# Altium PCB ESC.PcbDoc (part 1 of 2)
Units mm, origin at the board's own origin, x right, y up, seen from the top; angles counter-clockwise.
Board outline 45.01 x 30 mm, 4 copper layers (L1-SIGNAL/PWR, L2-GND, L3-PWR, L4-SIGNAL/PWR), stack 1.723 mm thick; 140 components, 74 nets, 427 pads, 338 vias.
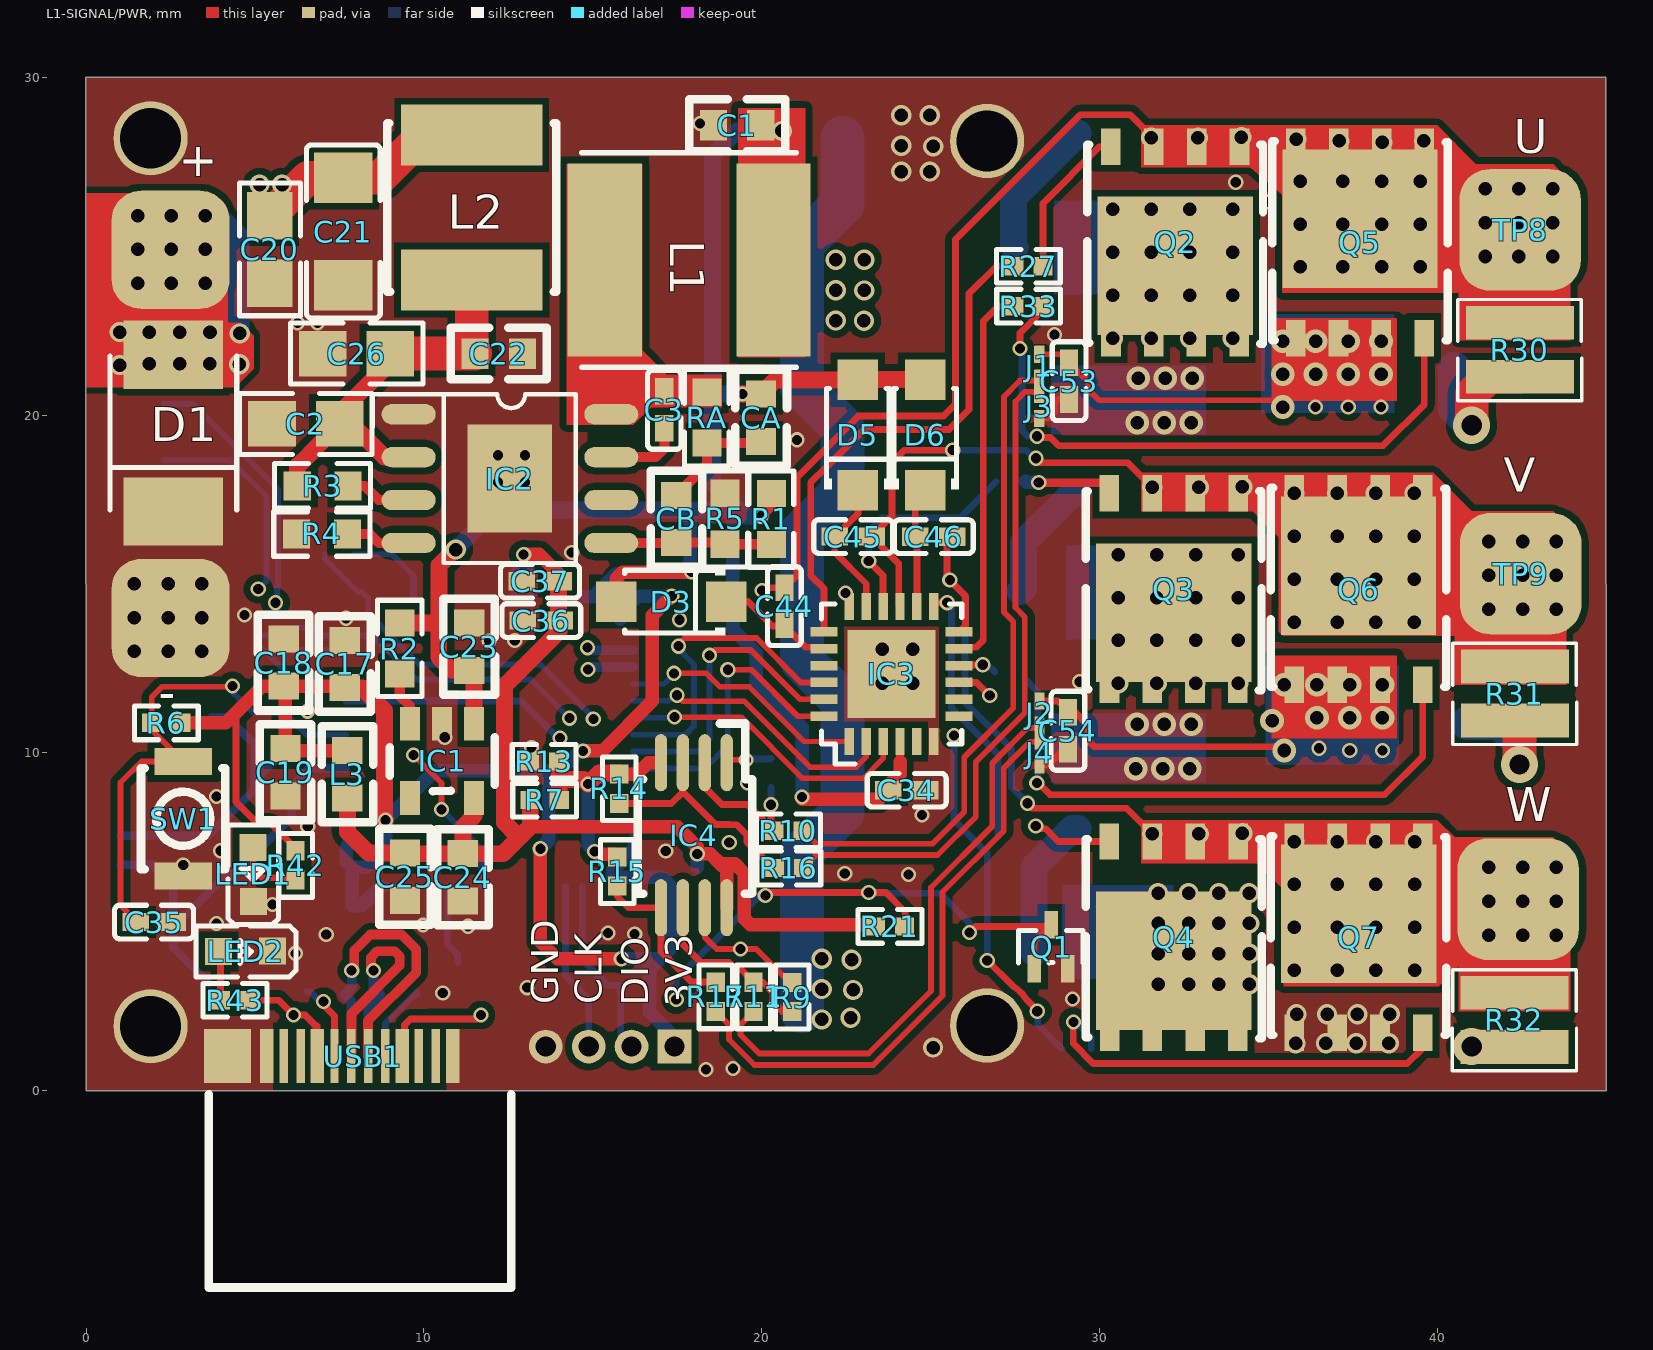
[diagram p0: L1-SIGNAL/PWR view]
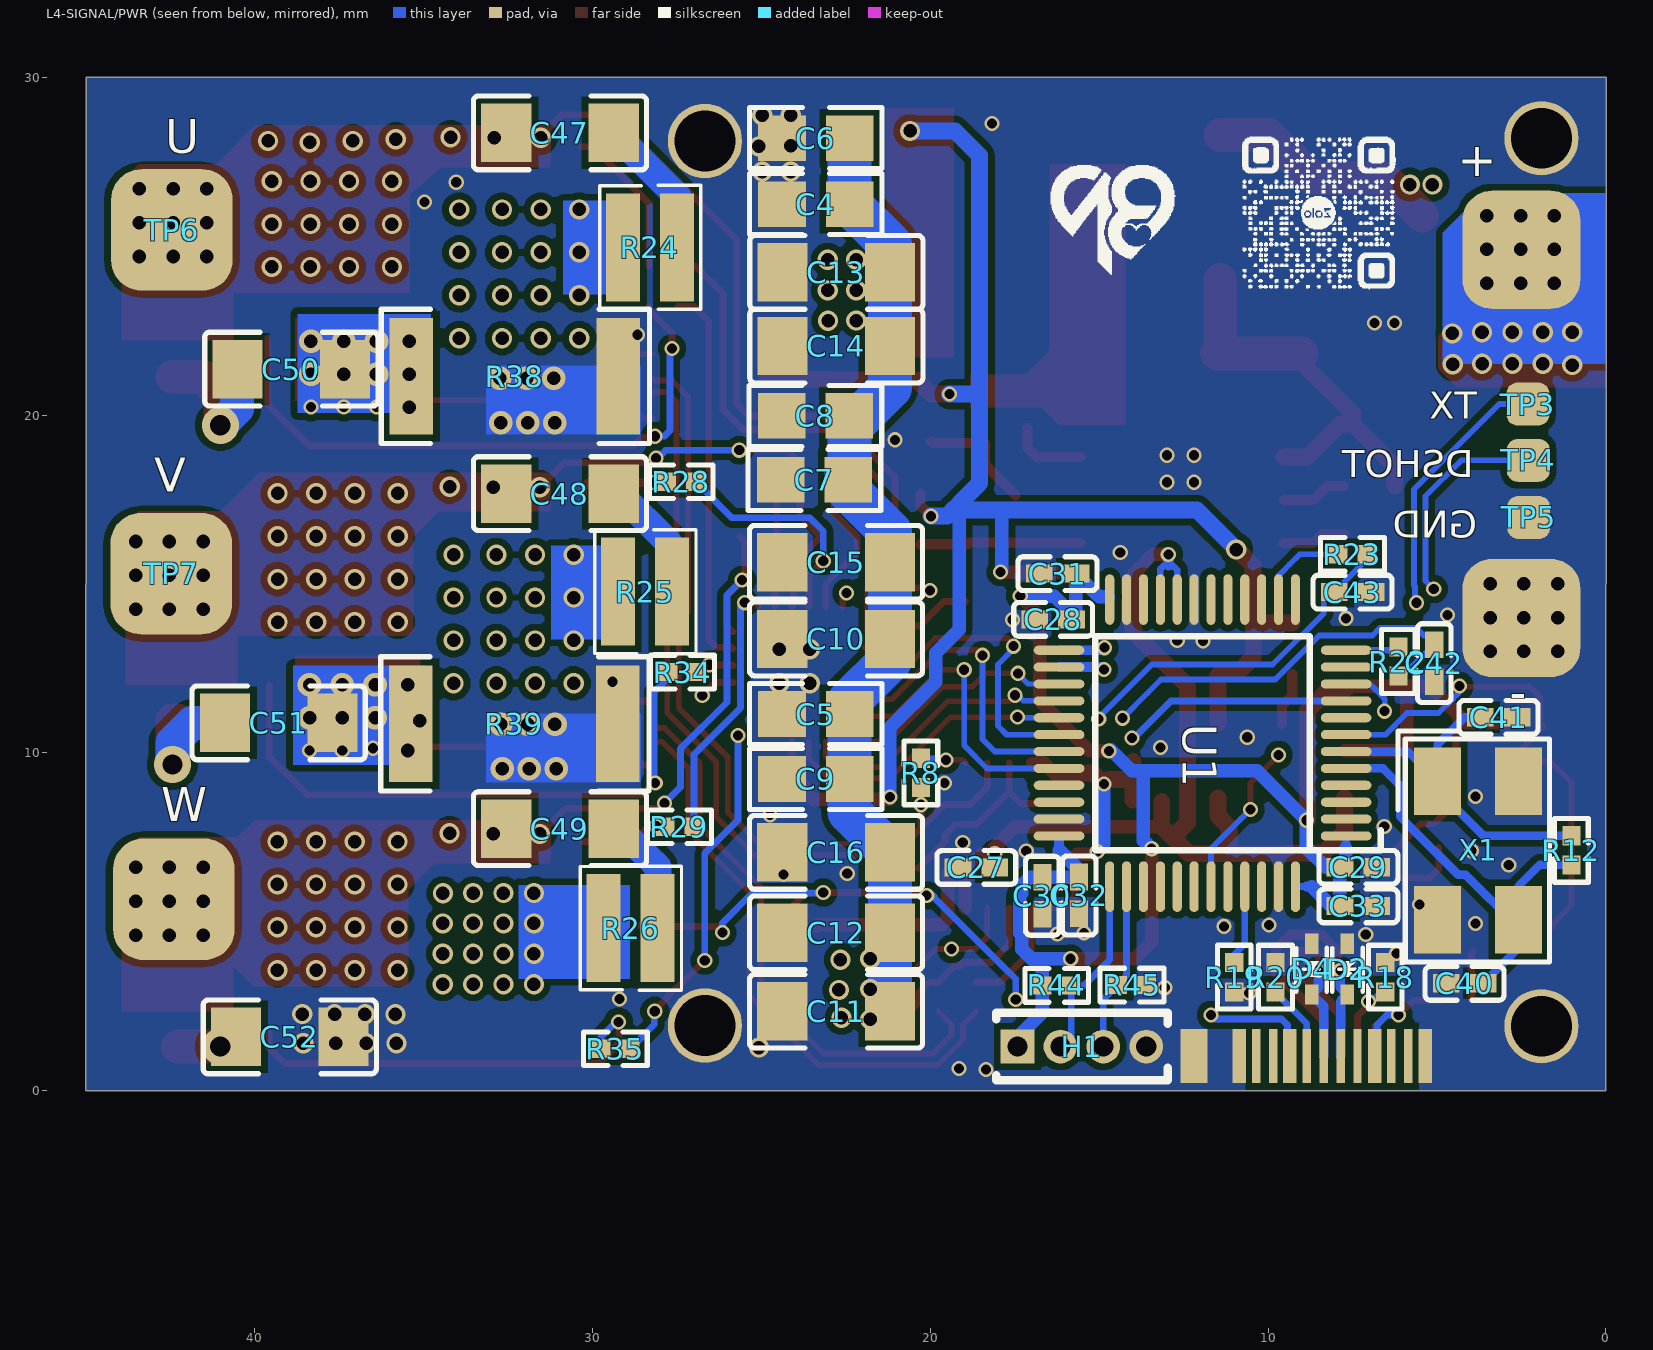
[diagram p1: L4-SIGNAL/PWR view, seen from below]
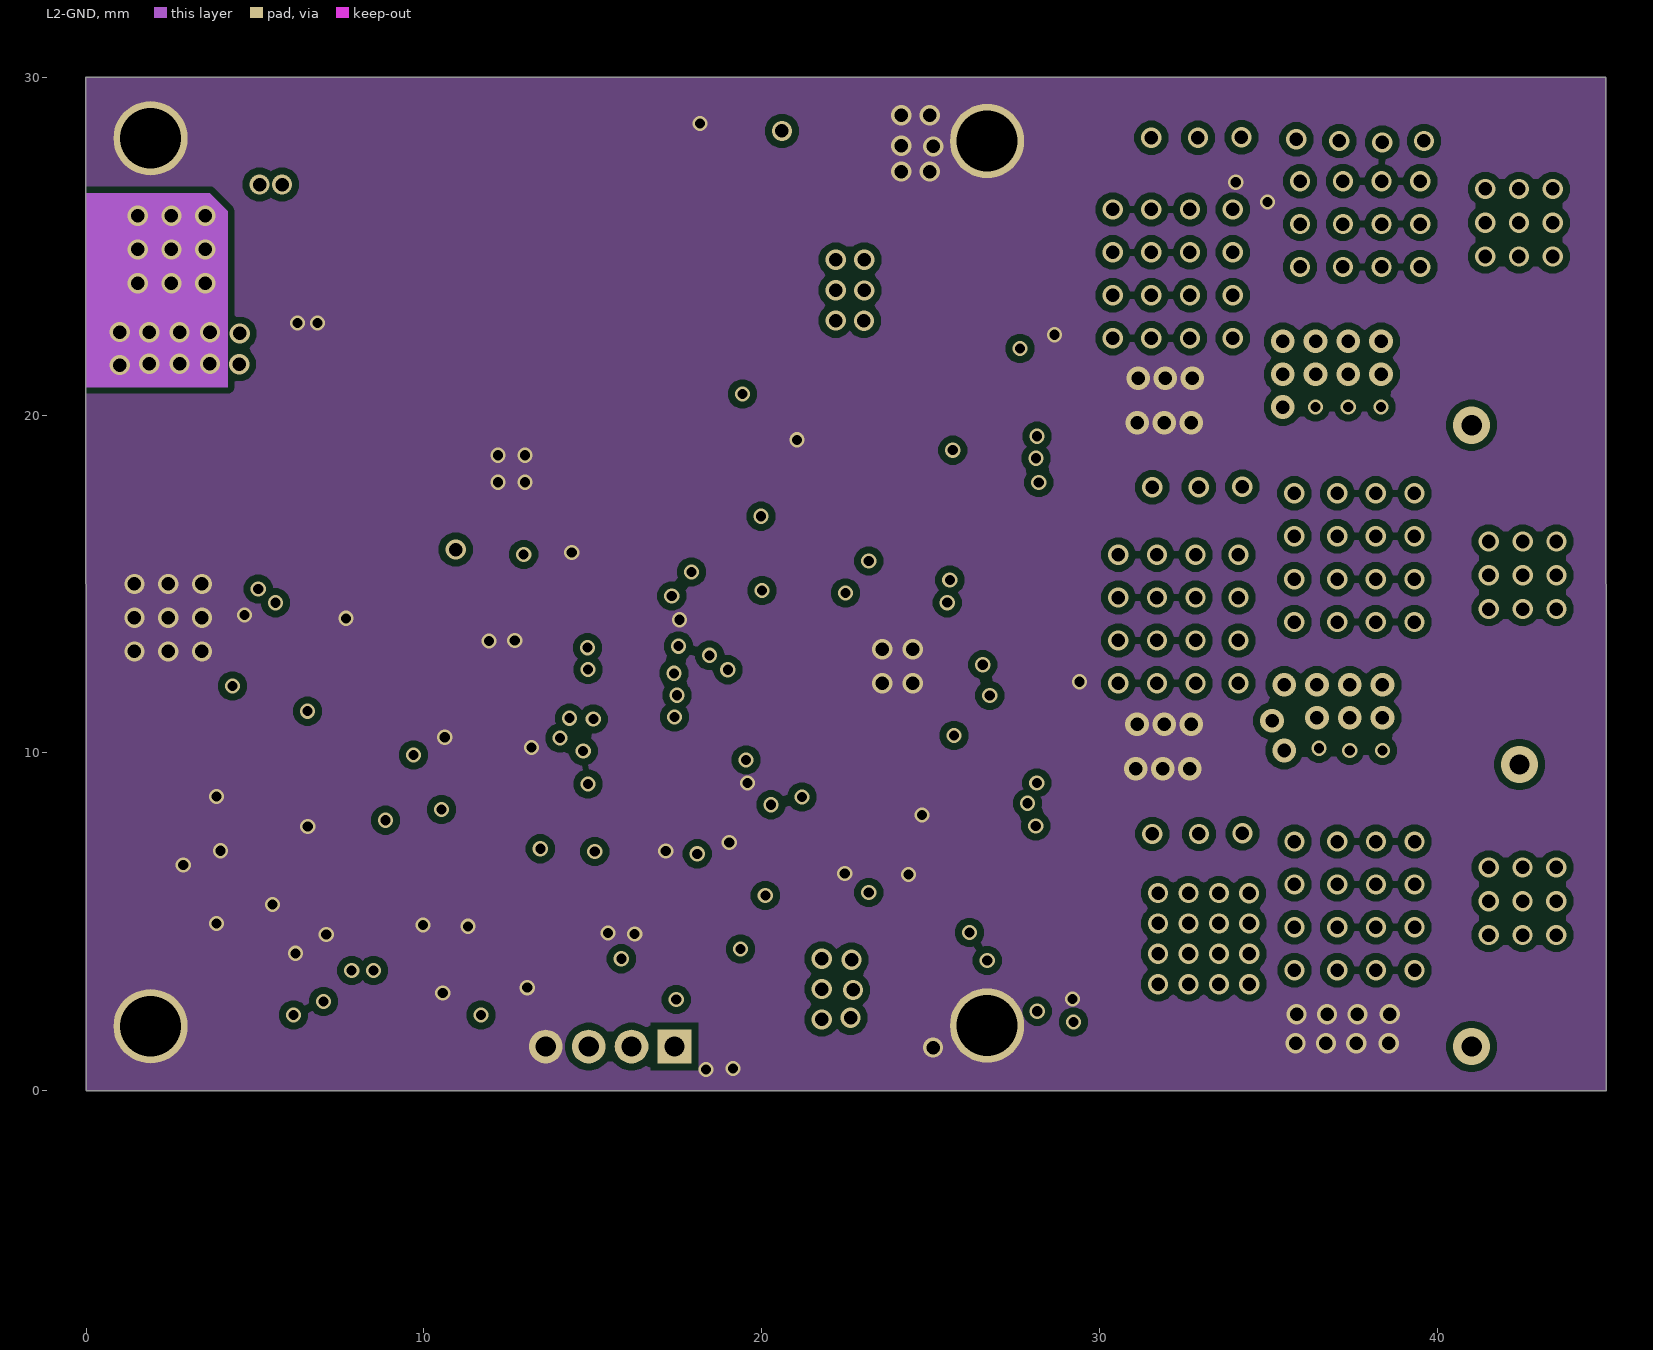
[diagram p2: L2-GND]
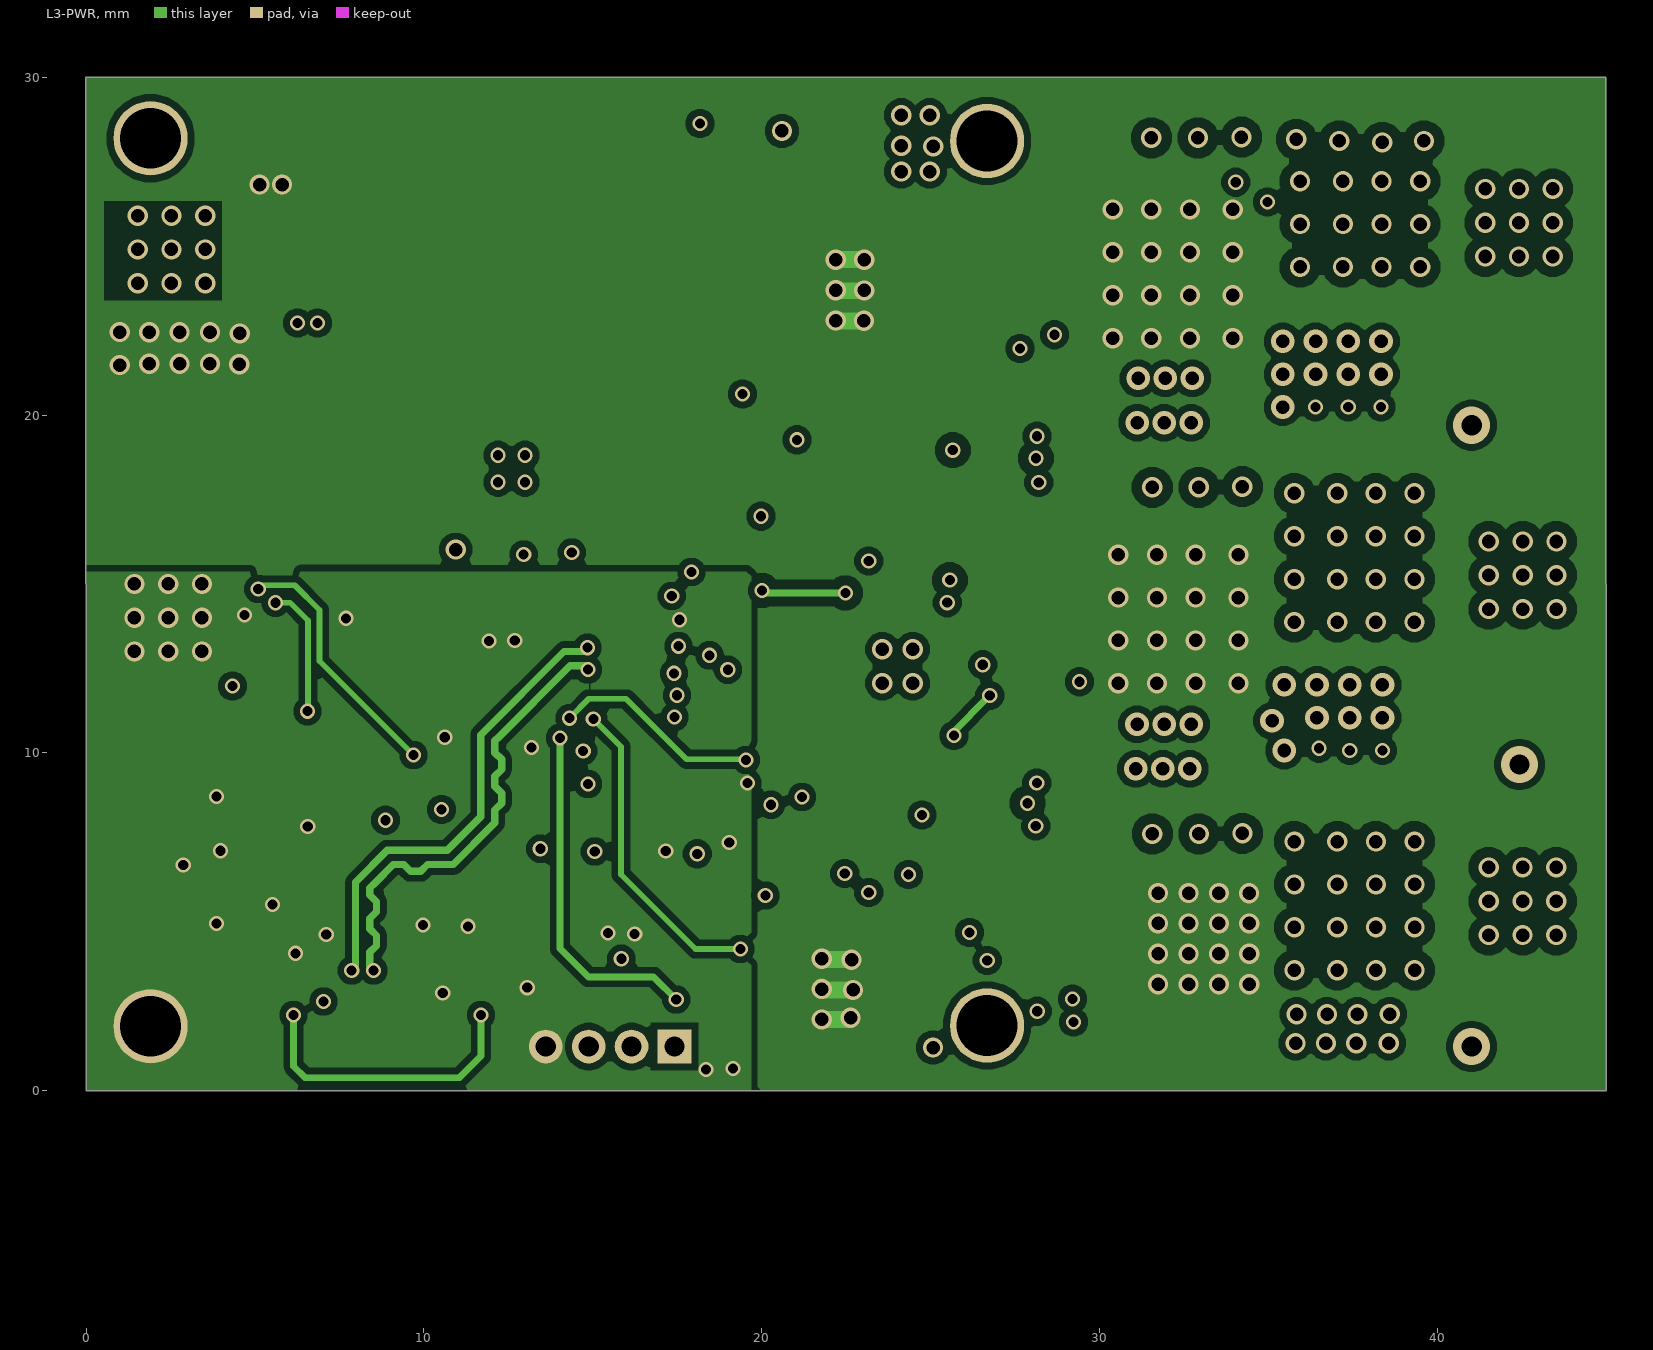
[diagram p3: L3-PWR]
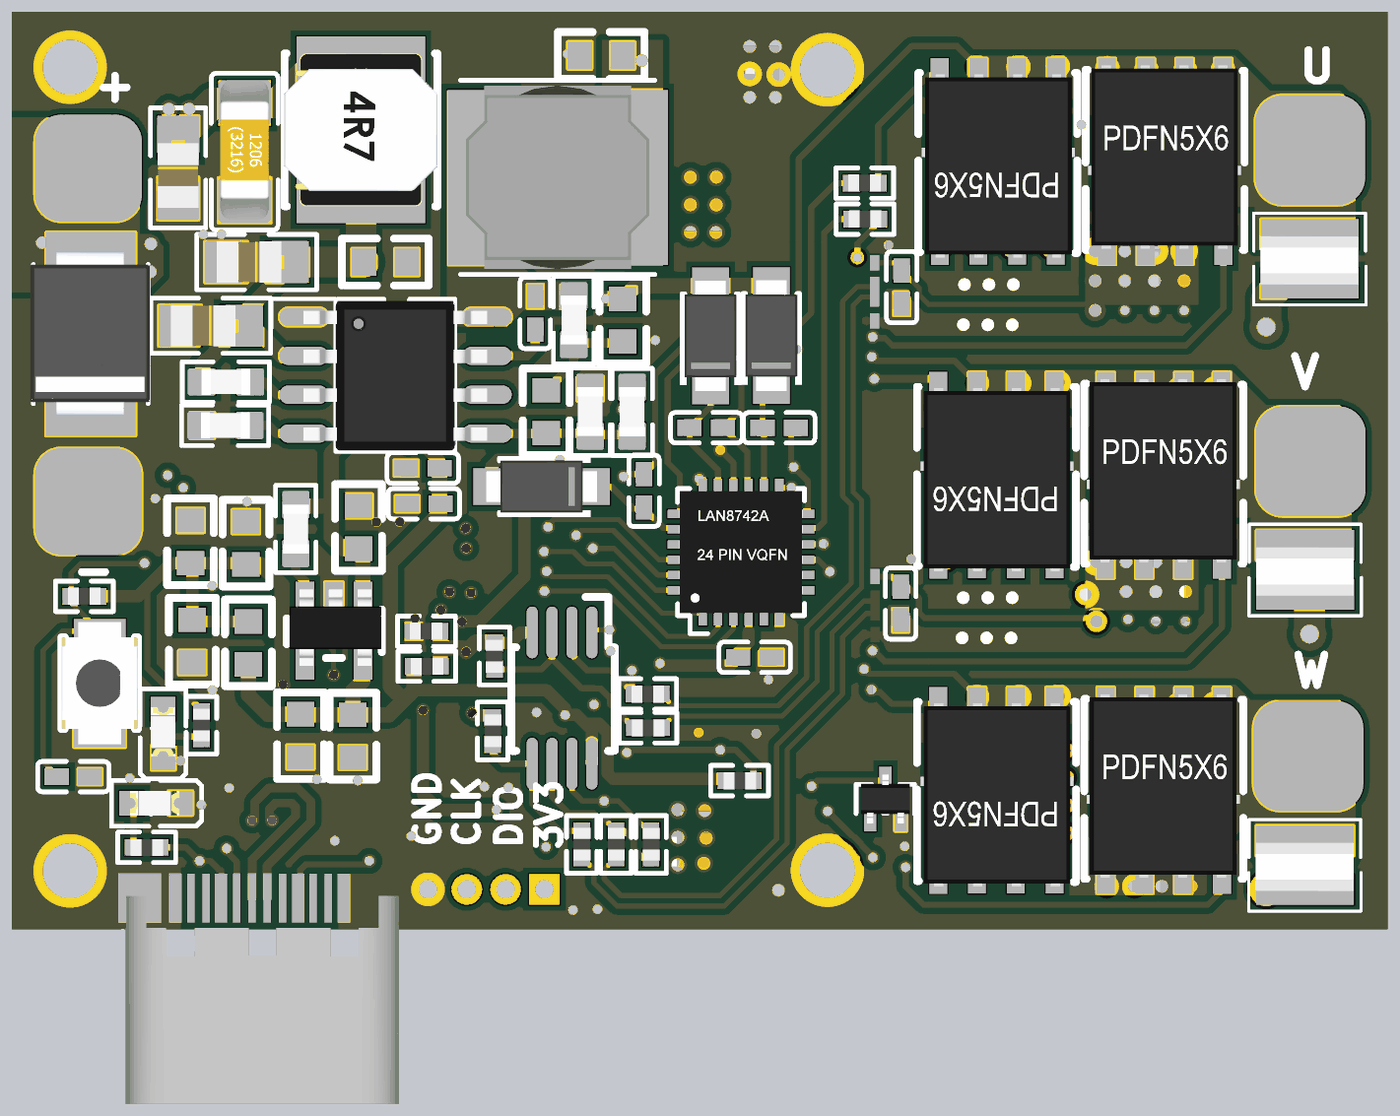
[diagram p5: 3D render of the assembled board from above, using the file's embedded part models]
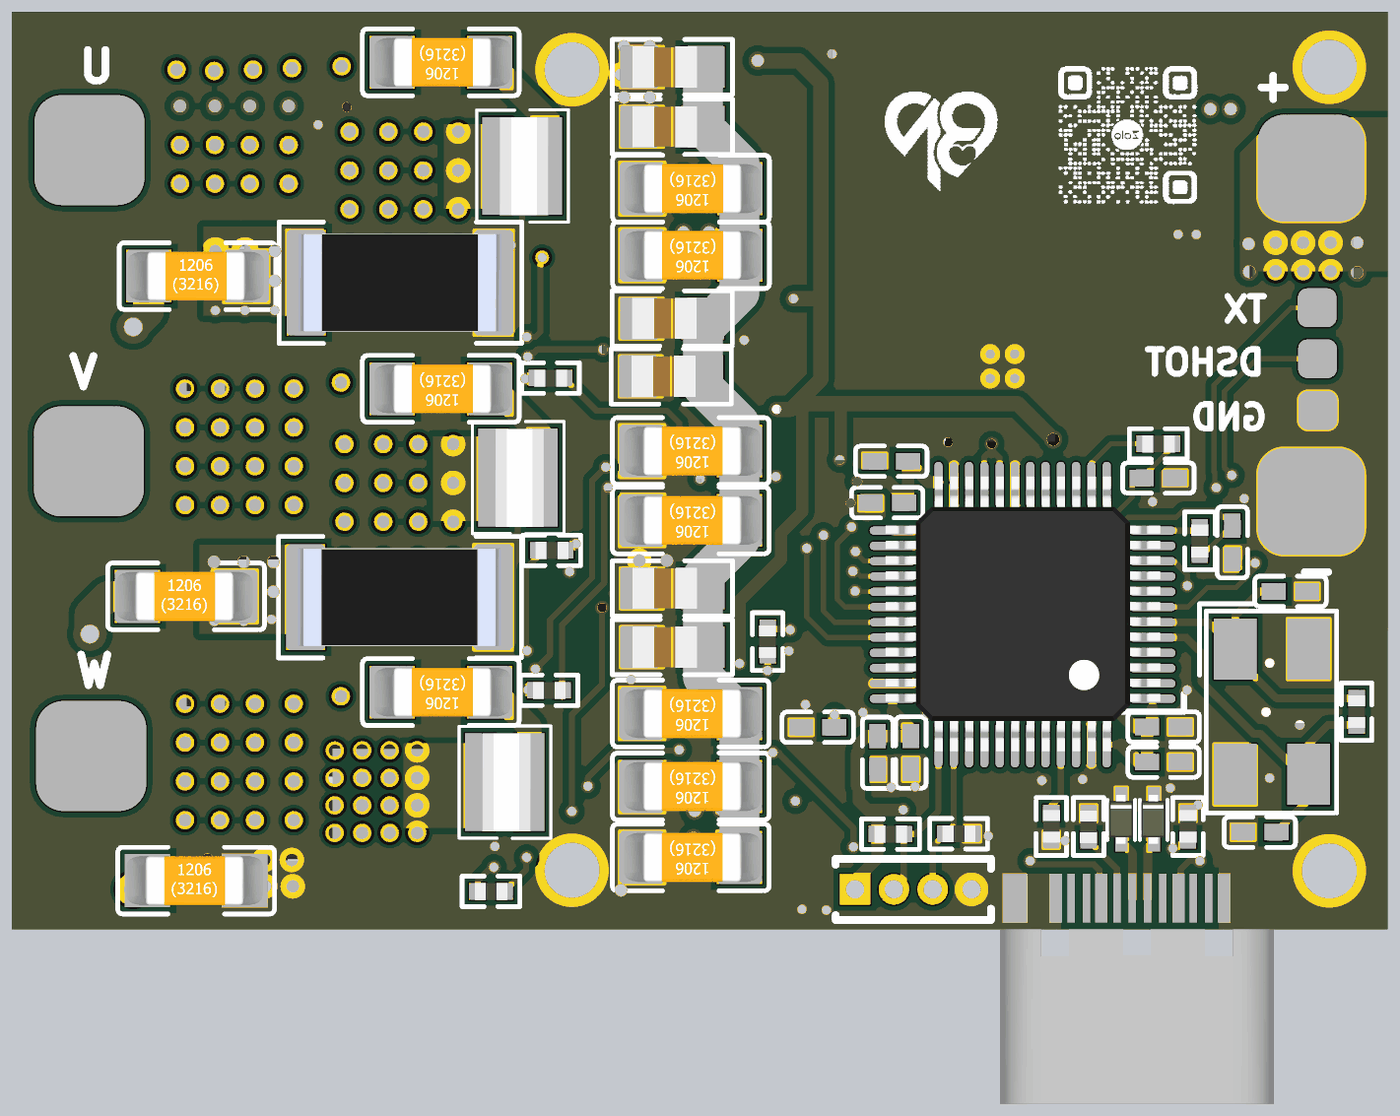
[diagram p6: 3D render of the assembled board from below, using the file's embedded part models]

## Layer stack, top to bottom
Top Solder: solder mask 0.0102, Solder Resist, Dk 3.5
L1-SIGNAL/PWR: signal copper 0.0356
Dielectric 2: prepreg 0.107, 3313, Dk 4.5
Dielectric 4: prepreg 0.0935, PP-006, Dk 4.1
L2-GND: signal copper 0.07
Dielectric 3: core 0.92, Core-042, Dk 4.6
L3-PWR: signal copper 0.07
Dielectric 1: dielectric 0.32, FR-4, Dk 4.8
Dielectric 5: prepreg 0.0711, PP-006, Dk 4.1
L4-SIGNAL/PWR: signal copper 0.0356
Bottom Solder: solder mask 0.0102, Solder Resist, Dk 3.5

## Board outline
0,0 -0.009,30 44.991,30 45,0

## Design rules (kind name [scope] priority, off if disabled: settings)
Clearance Clearance_1 [InNet('VM') vs InNet('SHA') OR InNet('SHB') OR InNet('SHC')] p1: gap=0.2 ignorepadtopadclearanceinfootprint=TRUE except(0.3: Arc-Fill Arc-Poly Arc-Region Track-Fill Track-Poly Track-Region SMDPad-Fill SMDPad-Poly SMDPad-Region THPad-Fill THPad-Poly THPad-Region Via-Fill Via-Poly Via-Region Fill-Fill Fill-Poly Fill-Region Poly-Poly Poly-Region Region-Region)
Clearance [All] p2: gap=0.2 ignorepadtopadclearanceinfootprint=TRUE except(0.17: Arc-Arc Arc-Track Track-Track)
DiffPairsRouting DiffPair_DIFF90DiffPairsRouting [InDifferentialPair ('USB')] p1: maxlimit=0.254 minlimit=0.203 mostfreqgap=0.254 toplayer_mingap=0.203 toplayer_prefgap=0.203 toplayer_minwidth=0.289 toplayer_maxwidth=0.381 toplayer_prefwidth=0.289 midlayer1_mingap=0.254 midlayer1_minwidth=0.381 midlayer1_maxwidth=0.381 midlayer1_prefwidth=0.381 midlayer2_mingap=0.203 midlayer2_prefgap=0.203 midlayer2_minwidth=0.217 midlayer2_maxwidth=0.381 midlayer2_prefwidth=0.217 bottomlayer_prefgap=0.203 bottomlayer_minwidth=0.289 bottomlayer_maxwidth=0.381 bottomlayer_prefwidth=0.289 maxuncoupledlength=12.7
DiffPairsRouting DiffPair_DIFFDiffPairsRouting [InDifferentialPairClass('DIFF')] p2: maxlimit=0.17 minlimit=0.17 mostfreqgap=0.17 toplayer_minwidth=0.17 toplayer_maxwidth=0.17 toplayer_prefwidth=0.17 midlayer1_minwidth=0.17 midlayer1_maxwidth=0.17 midlayer1_prefwidth=0.17 midlayer2_minwidth=0.17 midlayer2_maxwidth=0.17 midlayer2_prefwidth=0.17 bottomlayer_minwidth=0.17 bottomlayer_maxwidth=0.17 bottomlayer_prefwidth=0.17 maxuncoupledlength=12.7
DiffPairsRouting [All] p3: maxlimit=0.254 minlimit=0.254 mostfreqgap=0.254 toplayer_minwidth=0.381 toplayer_maxwidth=0.381 toplayer_prefwidth=0.381 midlayer1_minwidth=0.381 midlayer1_maxwidth=0.381 midlayer1_prefwidth=0.381 midlayer2_minwidth=0.381 midlayer2_maxwidth=0.381 midlayer2_prefwidth=0.381 bottomlayer_minwidth=0.381 bottomlayer_maxwidth=0.381 bottomlayer_prefwidth=0.381 maxuncoupledlength=12.7
HoleToHoleClearance [All] p1: gap=0.2 allowstackedmicrovias=TRUE
MatchedLengths DiffPair_DIFF90MatchedLengths [InDifferentialPair ('USB')] p1: tolerance=1.5 checknetsindiffpair=TRUE checkdiffpairvsdiffpair=FALSE checkxsignals=FALSE checkothers=FALSE
MatchedLengths DiffPair_DIFFMatchedLengths [InDifferentialPairClass('DIFF')] p2: tolerance=25.4 checknetsindiffpair=TRUE checkdiffpairvsdiffpair=FALSE checkxsignals=FALSE checkothers=FALSE
MinimumSolderMaskSliver [All] p1: minsoldermaskwidth=0.1
PlaneConnect [All] p1: planeconnectstyle=Direct reliefexpansion=0.508 reliefentries=4 reliefconductorwidth=0.254 reliefairgap=0.254
PolygonConnect [All] p1: connectstyle=Direct reliefconductorwidth=0.254 reliefentries=4 polygonreliefangle="90 Angle" airgapwidth=0.254
RoutingVias [All] p1: holewidth=0.4 width=0.7 viastyle="Through Hole" minholewidth=0.2 minwidth=0.4 maxholewidth=0.6 maxwidth=1.1
SilkToSilkClearance [All] p1: silktosilkclearance=0
SilkToSolderMaskClearance [IsPad] p1: minsilkscreentomaskgap=0.1 clearancetoexposedcopper=TRUE
SolderMaskExpansion [All] p1: expansion=0.102 istentingtop=FALSE
SupplyNets "Schematic Supply Nets_4" [InNet('VBUS')] p1: voltage=0.000
SupplyNets "Schematic Supply Nets_6" [InNet('12V')] p2: voltage=0.000
SupplyNets "Schematic Supply Nets_5" [InNet('VSYS')] p3: voltage=0.000
SupplyNets "Schematic Supply Nets_3" [InNet('3V3')] p4: voltage=0.000
SupplyNets "Schematic Supply Nets_2" [InNet('3V3A')] p5: voltage=0.000
SupplyNets "Schematic Supply Nets_1" [InNet('VM')] p6: voltage=0.000
SupplyNets "Schematic Supply Nets" [InNet('GND')] p7: voltage=0.000
Width Width_PWR [InNetClass('PWR')] p1: maxlimit=14 minlimit=0.15 preferedwidth=0.3
Width [All] p2: maxlimit=1.5 minlimit=0.15 preferedwidth=0.3
24 further rules are at their usual default settings.

## Classes and differential pairs
differential pair class DIFF90: USB
differential pair class DIFF: SA SB
net class POWER: SHA SHB SHC VM
net class PWR: 3V3 3V3A 12V GND VBUS VM VREF VSYS
differential pair USB: +USB_P -USB_N
differential pair SB: +SB_P -SB_N
differential pair SA: +SA_P -SA_N

## Components (designator, comment, footprint, x,y, rotation, side; value= is the part's Value field where it differs from the comment)
+ "TP" PAD#1 4.742,24.892 r0 top value="Test Point"
+ "TP" PAD#1 0.254,24.892 r180 bottom value="Test Point"
- "TP" PAD#1 4.742,13.989 r0 bottom value="Test Point"
- "TP" PAD#1 0.254,13.989 r180 top value="Test Point" (schematic designator TP2)
C1 "22uF" C0603 19.272,28.582 r0 top
C2 "2.2uF" C0805#1 6.501,19.738 r0 top
C3 "2.2nF" C0402#1 17.117,20.156 r270 top
C4 "100nF" C0805#2 23.389,26.248 r180 bottom
C5 "100nF" C0805#2 23.389,11.147 r180 bottom
C6 "100nF" C0805#2 23.389,28.199 r180 bottom
C7 "100nF" C0805#2 23.429,18.082 r180 bottom
C8 "100nF" C0805#2 23.399,19.975 r180 bottom
C9 "100nF" C0805#2 23.389,9.224 r180 bottom
C10 "10uF" C1206#1 22.789,13.37 r180 bottom
C11 "10uF" C1206#1 22.789,2.347 r180 bottom
C12 "10uF" C1206#1 22.789,4.667 r180 bottom
C13 "10uF" C1206#1 22.782,24.223 r180 bottom
C14 "10uF" C1206#1 22.782,22.045 r180 bottom
C15 "10uF" C1206#1 22.789,15.639 r180 bottom
C16 "10uF" C1206#1 22.789,7.051 r180 bottom
C17 "10uF" C0603 7.656,12.629 r270 top
C18 "1uF" C0603 5.844,12.672 r270 top
C19 "100nF" C0603 5.898,9.42 r90 top
C20 "100nF" C0805#1 5.437,24.903 r90 top
C21 "10uF" C1206#1 7.612,25.434 r90 top
C22 "1uF" C0603 12.216,21.82 r180 top
C23 "10uF" C0603 11.338,13.142 r270 top
C24 "10uF" C0603 11.151,6.311 r90 top
C25 "100nF" C0603 9.437,6.328 r90 top
C26 "100nF" C0805#1 8.006,21.821 r0 top
C27 "100nF" C0402#2 18.637,6.604 r180 bottom
C28 "100nF" C0402#2 16.362,13.95 r180 bottom
C29 "100nF" C0402#2 7.324,6.612 r0 bottom
C30 "100nF" C0402#2 16.68,5.766 r90 bottom
C31 "1uF" C0402#2 16.233,15.305 r180 bottom
C32 "1uF" C0402#2 15.594,5.775 r90 bottom
C33 "1uF" C0402#2 7.324,5.464 r0 bottom
C34 "1uF" C0402#1 24.294,8.892 r180 top
C35 "100nF" C0402#1 2.008,4.988 r0 top
C36 "100nF" C0402#1 13.474,13.915 r0 top
C37 "1uF" C0402#1 13.438,15.08 r0 top
C40 "18pF" C0402#2 4.18,3.173 r180 bottom
C41 "18pF" C0402#2 3.175,11.049 r180 bottom
C42 "1nF" C0402#2 5.077,12.653 r90 bottom
C43 "1nF" C0402#2 7.497,14.758 r0 bottom
C44 "100nF" C0402#1 20.674,14.34 r270 top
C45 "100nF" C0402#1 22.709,16.403 r180 top
C46 "100nF" C0402#1 25.095,16.4 r180 top
C47 "10nF" C1206#1 30.964,28.355 r180 bottom
C48 "10nF" C1206#1 30.964,17.673 r180 bottom
C49 "10nF" C1206#1 30.964,7.753 r180 bottom
C50 "10nF" C1206#1 38.921,21.36 r0 bottom
C51 "10nF" C1206#1 39.295,10.885 r0 bottom
C52 "10nF" C1206#2 38.965,1.587 r0 bottom
C53 "1nF" C0402#1 29.101,21.003 r90 top
C54 "1nF" C0402#1 29.068,10.653 r90 top
CA "3.3nF" C0603 19.98,19.919 r90 top
CB "56pF" C0603 17.473,16.925 r90 top
D1 "TVS DIODE 58VWM 85VC SMB" DO-214AA_L4.4-W3.6-LS5.3-RD 2.576,19.465 r90 top
D2 "TVS DIODE 5VWM 18.6VC SOD-523" SOD-523_L1.2-W0.8-LS1.6-BI 7.647,3.596 r270 bottom
D3 "DIODE SCHOTTKY 100V SOD-123FL" SOD-123FL_L2.7-W1.8-LS3.8-RD 17.322,14.476 r180 top
D4 "TVS DIODE 5VWM 18.6VC SOD-523" SOD-523_L1.2-W0.8-LS1.6-BI 8.708,3.596 r270 bottom
D5 "DIODE SCHOTTKY 100V SOD-123FL" SOD-123FL_L2.7-W1.8-LS3.8-RD 22.848,19.407 r90 top
D6 "DIODE SCHOTTKY 100V SOD-123FL" SOD-123FL_L2.7-W1.8-LS3.8-RD 24.836,19.415 r90 top
H1 "4PIN" HDR-TH_4P-P1.27-V-M 15.511,1.301 r180 bottom
IC1 "500mA Low-Noise LDo Voltage Regulator" SOT-23-5_L2.9-W1.6-P0.95-LS2.8-BR 10.534,9.762 r180 top
IC2 "100-V Input, 1-A Synchronous Buck DC/DC Converter" SO-8_L4.9-W3.9-P1.27-LS6.0-BL-EP 12.546,18.118 r270 top
IC3 "100V three-phase BLDC gate driver" QFN-24_L4.0-W4.0-P0.50-BL-EP2.7 23.845,12.333 r0 top
IC4 "Zero-Drift CMOS Rail-to-Rail I/O Opamp with RF Filter" MSOP-8_L3.0-W3.0-P0.65-LS5.0-BL 18.026,7.564 r180 top
J1 "2 way net tie junction" 2way_LP#1 28.221,21.446 r90 top net-tie
J2 "2 way net tie junction" 2way_LP#2 28.227,11.177 r90 top net-tie
J3 "2 way net tie junction" 2way_LP#1 28.22,20.256 r270 top net-tie
J4 "2 way net tie junction" 2way_LP#3 28.227,9.99 r270 top net-tie
L1 "47uH" IND-SMD_L6.0-W6.0 17.849,24.592 r0 top
L2 "47uH" IND-SMD_L5.0-W5.0_FNR50XXS 11.414,26.146 r270 top
L3 "FERRITE BEAD 120Ω 0603 1LN" C0603 7.732,9.362 r90 top
LED1 "XL-1608SURC-06" LED0603-RD_RED 4.942,6.353 r90 top
LED2 "XL-1608SURC-06" LED0603-RD_RED 4.766,4.116 r180 top
Q1 "TRANS NPN 40V 200mA SOT-416" SC-75-3_L1.6-W0.8-P1.00-LS1.6-BR 28.568,4.258 r0 top
Q2 "MOSFET N-CH 85V 170A PDFN5x6-8L" PDFN-8_L5.8-W5.1-P1.27-LS6.1-BL 32.243,24.417 r180 top
Q3 "MOSFET N-CH 85V 170A PDFN5x6-8L" PDFN-8_L5.8-W5.1-P1.27-LS6.1-BL 32.199,14.152 r180 top
Q4 "MOSFET N-CH 85V 170A PDFN5x6-8L" PDFN-8_L5.8-W5.1-P1.27-LS6.1-BL 32.201,3.844 r180 top
Q5 "MOSFET N-CH 85V 170A PDFN5x6-8L" PDFN-8_L5.8-W5.1-P1.27-LS6.1-BL 37.715,25.807 r0 top
Q6 "MOSFET N-CH 85V 170A PDFN5x6-8L" PDFN-8_L5.8-W5.1-P1.27-LS6.1-BL 37.671,15.542 r0 top
Q7 "MOSFET N-CH 85V 170A PDFN5x6-8L" PDFN-8_L5.8-W5.1-P1.27-LS6.1-BL 37.673,5.233 r0 top
R1 "453kΩ" R0603 20.286,16.922 r90 top
R2 "10kΩ" R0603 9.284,13.087 r270 top
R3 "10kΩ" R0603 7,17.9 r0 top
R4 "60.4kΩ" R0603 6.98,16.478 r0 top
R5 "49.9kΩ" R0603 18.914,16.928 r90 top
R6 "10kΩ" R0402 2.371,10.886 r0 top
R7 "1KΩ" R0402 13.571,8.6 r180 top
R8 "10kΩ" R0402 20.276,9.405 r90 bottom
R9 "10kΩ" R0402 20.904,2.768 r270 top
R10 "1KΩ" R0402 20.792,7.692 r180 top
R11 "1KΩ" R0402 19.76,2.772 r270 top
R12 "10MΩ" R0402 1.016,7.112 r270 bottom
R13 "1KΩ" R0402 13.558,9.744 r0 top
R14 "10kΩ" R0402 15.784,8.934 r90 top
R15 "10kΩ" R0402 15.724,6.483 r270 top
R16 "1KΩ" R0402 20.803,6.589 r180 top
R17 "1KΩ" R0402 18.637,2.772 r270 top
R18 "5.1KΩ" R0402 6.53,3.355 r270 bottom
R19 "10kΩ" R0402 10.998,3.355 r270 bottom
R20 "5.1KΩ" R0402 9.778,3.355 r90 bottom
R21 "33kΩ" R0402 23.798,4.857 r180 top
R22 "100Ω" R0402 6.14,12.702 r90 bottom
R23 "100Ω" R0402 7.499,15.875 r0 bottom
R24 "10Ω" R0612 28.301,24.966 r0 bottom
R25 "10Ω" R0612 28.445,14.771 r0 bottom
R26 "10Ω" R0612 28.874,4.809 r0 bottom
R27 "16Ω" R0402 27.894,24.404 r0 top
R28 "16Ω" R0402 27.376,18.027 r0 bottom
R29 "16Ω" R0402 27.427,7.812 r0 bottom
R30 "10Ω" R0612 42.447,21.931 r90 top
R31 "10Ω" R0612 42.298,11.754 r90 top
R32 "10Ω" R0612 42.289,2.092 r90 top
R33 "16Ω" R0402 27.903,23.225 r0 top
R34 "16Ω" R0402 27.336,12.39 r0 bottom
R35 "16Ω" R0402 29.323,1.234 r0 bottom
R38 "5mΩ" R2512 32.301,21.145 r0 bottom
R39 "5mΩ" R2512 32.316,10.857 r0 bottom
R42 "1kΩ" R0402 6.198,6.666 r270 top
R43 "1kΩ" R0402 4.406,2.674 r180 top
R44 "10kΩ" R0402 16.256,3.111 r0 bottom
R45 "10kΩ" R0402 14.027,3.121 r0 bottom
RA "270kΩ" R0603 18.376,19.924 r90 top
SW1 "B3U-1000P" KEY-SMD_B3U-1000PM 2.871,8.045 r270 top
TP3 "TP" PAD#2 2.304,22.571 r90 bottom value="Test Point"
TP4 "TP" PAD#2 2.293,20.902 r90 bottom value="Test Point"
TP5 "TP" PAD#2 2.283,19.213 r90 bottom value="Test Point"
TP6 "U" PAD#3 42.455,27.727 r90 bottom value="Test Point"
TP7 "V" PAD#3 42.474,17.547 r90 bottom value="Test Point"
TP8 "U" PAD#3 42.455,27.727 r90 top value="Test Point"
TP9 "V" PAD#3 42.474,17.547 r90 top value="Test Point"
U1 "Arm Cortex-M4 32-bit MCU+FPU, 170 MHz / 213 DMIPS, up to 128 KB Flash, 32 KB SRAM, rich analog, math accelerator" LQFP-48_L7.0-W7.0-P0.50-LS9.0-BL 11.938,10.287 r90 bottom
USB1 "CONN RCPT Type-C 24POS SMD" USB-C-SMD_U263-241N-4BQC14 8.111,-2.072 r180 top
W "TP" PAD#3 42.397,7.908 r90 top value="Test Point"
W "TP" PAD#3 42.397,7.908 r90 bottom value="Test Point" (schematic designator TP8)
X1 "8MHz" OSC-SMD_4P-L5.0-W3.2-BL 3.783,7.112 r270 bottom

## Footprints (in the part's own frame and the unit in brackets; to place one, negate y for a bottom-side part, rotate by r counter-clockwise, add the part's x,y. Pads: shape width x height; smd on the part's side, far side on the other; paste and mask are expansions set on the pad)
2way_LP#1 [mil] "2 way low power net tie junction"
  rrect5% 20x12 smd paste+0 mask+4: 1(-14,0) 2(14,0)
2way_LP#2 [mil] "2 way low power net tie junction"
  rrect5% 20x12 smd paste-100 mask+4: 1(-14,0)
  rrect5% 20x12 smd paste+0 mask+4: 2(14,0)
2way_LP#3 [mil] "2 way low power net tie junction"
  rrect5% 20x12 smd paste-100 mask+4: 1(-14,0) 2(14,0)
C0402#1 [mm] "cap"
  rect 0.79x0.54 smd paste+0 mask+0.05: 1(-0.545,0) 2(0.545,0)
  silkscreen extent -1.17,-0.5 1.17,0.5, body extent -0.52,-0.27 0.52,0.26, height 0.53
C0402#2 [mm] "cap"
  rect 0.79x0.54 smd paste+0 mask+0.051: 1(-0.545,0) 2(0.545,0)
  silkscreen extent -1.17,-0.5 1.17,0.5, body extent -0.52,-0.27 0.52,0.26, height 0.53
C0603 [mm] "cap 0603"
  rect 0.8x0.9 smd paste+0 mask+0.051: 1(-0.7,0) 2(0.7,0)
  silkscreen extent -1.41,-0.77 1.42,0.76, body extent -0.81,-0.4 0.79,0.4, height 0.8
C0805#1 [mm]
  rect 1.41x1.35 smd paste-100 mask+0.05: 1(-1,0)
  rect 1.41x1.35 smd paste-100 mask+0.051: 2(1,0)
  silkscreen extent -1.96,-0.9 1.96,0.9, body extent -1.3,-0.67 0.8,0.67, height 0.71
C0805#2 [mm]
  rect 1.41x1.35 smd paste-100 mask+0.051: 1(-1,0) 2(1,0)
  silkscreen extent -1.96,-0.9 1.96,0.9, body extent -1.3,-0.67 0.8,0.67, height 0.71
C1206#1 [mm] "1206"
  rect 1.485x1.728 smd paste-100 mask+0.051: 1(-1.593,0) 2(1.593,0)
  silkscreen extent -2.56,-1.09 2.56,1.09, body extent -2.22,-0.8 2.32,0.8, height 1.25
C1206#2 [mm] "1206"
  rect 1.485x1.728 smd paste+0 mask+0.02: 1(-1.593,0) 2(1.593,0)
  silkscreen extent -2.56,-1.09 2.56,1.09, body extent -2.22,-0.8 2.32,0.8, height 1.25
DO-214AA_L4.4-W3.6-LS5.3-RD [mm]
  rect 2.024x2.94 smd paste+0 mask+0.051: 1(-2.322,-0.002) 2(2.322,-0.002)
  silkscreen extent -2.28,-1.88 2.28,1.88, body extent -2.68,-1.93 2.72,1.97, height 2.5
HDR-TH_4P-P1.27-V-M [mm] "PITCH 1.27"
  rect 1x1 hole 0.6 paste-2539.97 mask+0.051: 1(-1.905,0)
  round 1 hole 0.6 paste-2539.97 mask+0.051: 2(-0.635,0) 3(0.635,0) 4(1.905,0)
  silkscreen extent -2.54,-1 2.54,1
IND-SMD_L5.0-W5.0_FNR50XXS [mm] "SMD,5x5mm"
  rect 1.8x4.2 smd paste+0 mask+0.051: 1(-2.15,0) 2(2.15,0)
  silkscreen extent -2.5,-2.5 2.5,2.5, body extent -2.5,-2.5 2.5,2.5, height 4
IND-SMD_L6.0-W6.0 [mm] "SMD,6x6mm"
  rect 2.2x5.72 smd paste+0 mask+0.051: 1(-2.5,0) 2(2.5,0)
  silkscreen extent -3.18,-3.18 3.18,3.18, body extent -3,-3 3,3, height 4.5
KEY-SMD_B3U-1000PM [mm]
  rect 0.8x1.7 smd paste+0 mask+0.051: 1(-1.7,0) 2(1.7,0)
  silkscreen extent -1.5,-1.25 1.5,1.25, body extent -2,-1.25 2,1.25, height 1.75
LED0603-RD_RED [mm] "LED RED"
  rect 0.8x0.8 smd paste+0 mask+0.051: 1(-0.75,-0.009) 2(0.849,-0.002)
  silkscreen extent -1.44,-0.75 1.51,0.75, body extent -0.7,-0.41 0.9,0.39, height 0.7
LQFP-48_L7.0-W7.0-P0.50-LS9.0-BL [mm] "LQFP-48(7x7)"
  oval 0.27x1.5 smd paste+0 mask+0.05: 1(-2.75,-4.25) 2(-2.25,-4.25) 3(-1.75,-4.25) 4(-1.25,-4.25) 5(-0.75,-4.25) 6(-0.25,-4.25) 7(0.25,-4.25) 8(0.75,-4.25) 9(1.25,-4.25) 10(1.75,-4.25) 11(2.25,-4.25) 12(2.75,-4.25) 25(2.75,4.25) 26(2.25,4.25) 27(1.75,4.25) 28(1.25,4.25) 29(0.75,4.25) 30(0.25,4.25) 31(-0.25,4.25) 32(-0.75,4.25) 33(-1.25,4.25) 34(-1.75,4.25) 35(-2.25,4.25) 36(-2.75,4.25)
  oval 1.5x0.27 smd paste+0 mask+0.05: 13(4.25,-2.75) 14(4.25,-2.25) 15(4.25,-1.75) 16(4.25,-1.25) 17(4.25,-0.75) 18(4.25,-0.25) 19(4.25,0.25) 20(4.25,0.75) 21(4.25,1.25) 22(4.25,1.75) 23(4.25,2.25) 24(4.25,2.75) 37(-4.25,2.75) 38(-4.25,2.25) 39(-4.25,1.75) 40(-4.25,1.25) 41(-4.25,0.75) 42(-4.25,0.25) 43(-4.25,-0.25) 44(-4.25,-0.75) 45(-4.25,-1.25) 46(-4.25,-1.75) 47(-4.25,-2.25) 48(-4.25,-2.75)
  silkscreen extent -3.18,-5.28 3.16,3.18, body extent -4.47,-4.51 4.53,4.49, height 1.6
MSOP-8_L3.0-W3.0-P0.65-LS5.0-BL [mm] "MSOP-8"
  oval 0.364x1.692 smd paste+0 mask+0.05: 1(-0.939,-2.142) 2(-0.289,-2.142) 3(0.361,-2.142) 4(1.011,-2.142) 5(1.011,2.15) 6(0.361,2.15) 7(-0.289,2.15) 8(-0.939,2.15)
  silkscreen extent -1.69,-3.3 1.69,1.73, body extent -1.5,-2.45 1.5,2.45, height 1.15
OSC-SMD_4P-L5.0-W3.2-BL [mm]
  rect 2x1.4 smd paste+0 mask+0.051: 1(-2.05,-1.2) 2(2.05,-1.2) 3(2.05,1.2) 4(-2.05,1.2)
  silkscreen extent -3.53,-2.37 3.31,2.12, body extent -2.63,-1.68 2.47,1.62, height 1.1
PAD#1 [mm]
  rrect50% 3.5x3.5 smd mask+0.05: 1(-2.244,0)
PAD#2 [mm]
  rrect50% 1.27x1.27 smd mask+0.05: 1(-2.244,0)
PAD#3 [mm]
  rrect50% 3.6x3.6 smd mask+0.05: 1(-2.244,0)
PDFN-8_L5.8-W5.1-P1.27-LS6.1-BL [mm] "PDFN5x6-8L"
  rect 0.58x1.079 smd paste+0 mask+0.05: 1(-1.905,-3.53) 2(-0.635,-3.53) 3(0.635,-3.53) 4(1.905,-3.53)
  rect 0.58x1.08 smd paste+0 mask+0.05: 5(1.9,2.14) 6(0.64,2.14) 7(-0.63,2.14) 8(-1.9,2.14)
  rect 4.6x4.1 smd paste+0 mask+0.05: 9(0,0)
  silkscreen extent -2.6,-3.59 2.6,2.3, body extent -2.52,-3.55 2.48,2.45, height 1.02
QFN-24_L4.0-W4.0-P0.50-BL-EP2.7 [mm] "QFN-24"
  rect 0.28x0.8 smd paste+0 mask+0.05: 1(-1.25,-2) 2(-0.75,-2) 3(-0.25,-2) 4(0.25,-2) 5(0.75,-2) 6(1.25,-2) 13(1.25,2) 14(0.75,2) 15(0.25,2) 16(-0.25,2) 17(-0.75,2) 18(-1.25,2)
  rect 0.8x0.28 smd paste+0 mask+0.05: 7(2,-1.25) 8(2,-0.75) 9(2,-0.25) 10(2,0.25) 11(2,0.75) 12(2,1.25) 19(-2,1.25) 20(-2,0.75) 21(-2,0.25) 22(-2,-0.25) 23(-2,-0.75) 24(-2,-1.25)
  rect 2.6x2.6 smd paste+0 mask+0.05: 25(0,0)
  silkscreen extent -2.08,-2.67 2.08,2.08, body extent -2.01,-2.01 2.01,2.01, height 0.81
R0402 [mm] "0402"
  rect 0.566x0.54 smd paste-100 mask+0.051: 1(-0.433,0) 2(0.433,0)
  silkscreen extent -0.94,-0.5 0.94,0.5, body extent -0.54,-0.27 0.53,0.28, height 0.41
R0603 [mm] "Resister pakage 0603"
  rect 0.806x0.864 smd paste-100 mask+0.051: 1(-0.753,0) 2(0.753,0)
  silkscreen extent -1.43,-0.66 1.42,0.66, body extent -0.8,-0.43 0.8,0.43, height 0.48
R0612 [mm]
  rect 1x3.2 smd paste+0 mask+0.051: 1(-0.8,0) 2(0.8,0)
  silkscreen extent -1.51,-1.84 1.49,1.84, body extent -0.86,-1.59 0.74,1.61, height 0.76
R2512 [mm] "R2512"
  rect 1.283x3.456 smd paste-100 mask+0.051: 1(-3.066,0) 2(3.066,0)
  silkscreen extent -3.99,-1.99 3.96,1.99, body extent -3.35,-1.6 3.35,1.6, height 0.55
SC-75-3_L1.6-W0.8-P1.00-LS1.6-BR [mm] "SOT-416"
  rect 0.4x0.816 smd paste+0 mask+0.051: 1(-0.5,-0.65) 2(0.5,-0.65) 3(0,0.65)
  silkscreen extent -0.96,-0.48 0.95,0.48, body extent -0.8,-0.8 0.8,0.8, height 0.78
SO-8_L4.9-W3.9-P1.27-LS6.0-BL-EP [mm] "SO-8-EP"
  oval 0.6x1.6 smd paste+0 mask+0.051: 1(-1.905,-3) 2(-0.635,-3) 3(0.635,-3) 4(1.905,-3) 5(1.905,3) 6(0.635,3) 7(-0.635,3) 8(-1.905,3)
  rect 3.2x2.5 smd paste+0 mask+0.051: 9(0,0)
  silkscreen extent -2.5,-4.06 2.5,1.95, body extent -2.43,-3.01 2.47,2.99, height 1.7
SOD-123FL_L2.7-W1.8-LS3.8-RD [mm] "SOD-123FL"
  rect 1.2x1.2 smd paste+0 mask+0.051: 1(-1.635,0) 2(1.635,0)
  silkscreen extent -1.6,-1 1.38,1, body extent -1.81,-0.85 1.81,0.85, height 0.9
SOD-523_L1.2-W0.8-LS1.6-BI [mm] "9.4A@8/20us 18.6V 7.8V 5V SOD-523 TVS Diodes RoHS"
  rect 0.6x0.4 smd paste+0 mask+0.051: 1(-0.75,0) 2(0.75,0)
  silkscreen extent -0.63,-0.45 0.68,0.45, body extent -0.8,-0.41 0.8,0.39, height 0.7
SOT-23-5_L2.9-W1.6-P0.95-LS2.8-BR [mm] "SOT-23-5"
  rect 0.6x1 smd paste+0 mask+0.05: 1(-0.95,-1.1) 2(0,-1.1) 3(0.95,-1.1) 4(0.95,1.1) 5(-0.95,1.1)
  silkscreen extent -1.56,-0.7 1.54,0.9, body extent -1.55,-1.35 1.45,1.15, height 1.1
USB-C-SMD_U263-241N-4BQC14 [mm]
  rect 0.8x1.6 smd far side paste+0 mask+0.01: 0(-4.073,-3.088)
  rect 1.39x1.6 smd paste+0 mask+0.01: 0(3.932,-3.088)
  rect 0.4x1.6 smd paste+0 mask+0.01: A1(2.762,-3.088) A4(1.272,-3.088) A9(-1.249,-3.088) A12(-2.738,-3.088)
  rect 0.25x1.6 smd paste+0 mask+0.01: A2(2.262,-3.088) A3(1.762,-3.088) A5(0.762,-3.088) A6(0.262,-3.088) A7(-0.238,-3.088) A8(-0.738,-3.088) A10(-1.738,-3.088) A11(-2.238,-3.088)
  rect 0.4x1.6 smd far side paste+0 mask+0.01: B1(-2.738,-3.088) B4(-1.248,-3.088) B9(1.272,-3.088) B12(2.762,-3.088)
  rect 0.25x1.6 smd far side paste+0 mask+0.01: B2(-2.238,-3.088) B3(-1.738,-3.088) B5(-0.738,-3.088) B6(-0.238,-3.088) B7(0.262,-3.088) B8(0.761,-3.088) B10(1.761,-3.088) B11(2.262,-3.088)
  silkscreen extent -4.47,-1.97 4.48,3.76, body extent -4.55,-3.16 4.39,3.64, height 1.58

## Part data
+ + - - TP3 TP4 TP5 TP6 TP7 TP8 TP9 W W: library part Test_point_DNM, "Test Point"
C1: library part GRM188C61E226ME01D, "CAP CER 22uF 25V 0603", Simulation ModelName=C_Capacitor_Default, Simulation ModelText="C_Capacitor_Default 1 0 1p", Simulation PortMap=(1:1),(2:2)
C2: library part HHV0805R7225K101NSLJ, "CAP CER 2.2uF 100V X7R 0805"
C3: library part GCM155R71H222KA37D, "CAP CER 2.2nF 50V X7R 0402"
C4 C5 C6 C7 C8 C9 C20 C26: library part CL21B104KCFNNNE, "100nF ±10% 100V Ceramic Capacitor X7R 0805", Simulation ModelName=C_Capacitor_Default, Simulation ModelText="C_Capacitor_Default 1 0 1p", Simulation PortMap=(1:1),(2:2)
C10 C11 C12 C13 C14 C15 C16 C21: library part C3216X6S2A106KT0A0E, "10uF X6S ±10% 100V 1206 Ceramic Capacitors RoHS", Simulation ModelName=C_Capacitor_Default, Simulation ModelText="C_Capacitor_Default 1 0 1p", Simulation PortMap=(1:1),(2:2)
C17 C23 C24: library part CL10A106MA8NRNC, "CAP CER 10uF 25V X5R 0603", Simulation ModelName=C_Capacitor_Default, Simulation ModelText="C_Capacitor_Default 1 0 1p", Simulation PortMap=(1:1),(2:2)
C18 C22: library part GRM188D72A105KE01D, "1uF ±10% 100V Ceramic Capacitor X7T 0603", Simulation ModelName=C_Capacitor_Default, Simulation ModelText="C_Capacitor_Default 1 0 1p", Simulation PortMap=(1:1),(2:2)
C19 C25: library part CC0603KRX7R9BB104, "100nF ±10% 50V Ceramic Capacitor X7R 0603", Simulation ModelName=C_Capacitor_Default, Simulation ModelText="C_Capacitor_Default 1 0 1p", Simulation PortMap=(1:1),(2:2)
C27 C28 C29 C30 C35 C36 C44 C45 C46: library part GRM155R71H104KE14D, "CAP CER 100nF 50V X7R 0402", Simulation ModelName=C_Capacitor_Default, Simulation ModelText="C_Capacitor_Default 1 0 1p", Simulation PortMap=(1:1),(2:2)
C31 C32 C33 C34 C37: library part GRM155R61E105KA12D, "CAP CER 1uF 25V X5R 0402", Simulation ModelName=C_Capacitor_Default, Simulation ModelText="C_Capacitor_Default 1 0 1p", Simulation PortMap=(1:1),(2:2)
C40 C41: library part CC0402FRNPO9BN180, "CAP CER 18pF 50V NP0 0402", Simulation ModelName=C_Capacitor_Default, Simulation ModelText="C_Capacitor_Default 1 0 1p", Simulation PortMap=(1:1),(2:2)
C42 C43 C53 C54: library part CL05C102JB5NNNC, "CAP CER 1nF 50V C0G 0402", Simulation ModelName=C_Capacitor_Default, Simulation ModelText="C_Capacitor_Default 1 0 1p", Simulation PortMap=(1:1),(2:2)
C47 C48 C49 C50 C51 C52: library part CC1206KRX7R0BB103, "CAP CER 10nF 100V X7R 1206"
CA: library part CL10B332KB8NNNC, "CAP CER 3.3nF 50V X7R 0603", Simulation ModelName=C_Capacitor_Default, Simulation ModelText="C_Capacitor_Default 1 0 1p", Simulation PortMap=(1:1),(2:2)
CB: library part CL10C560JB8NNNC, "CAP CER 56pF 50V C0G 0603", Simulation ModelName=C_Capacitor_Default, Simulation ModelText="C_Capacitor_Default 1 0 1p", Simulation PortMap=(1:1),(2:2)
D1: library part ESSMBJ58C2H
D2 D4: library part LESD5D5.0CT1G, "9.4A@8/20us 18.6V 7.8V 5V SOD-523 TVS Diodes RoHS"
D3 D5 D6: library part DSS110
H1: library part PZ127V-11-04-0720, "CONN HEADER 4POS 1.27mm SINGLE ROW TH"
IC1: library part SPX3819M5-L-3-3, "3.3V 16V Positive Fixed SOT-23-5 Voltage Regulators - Linear, Low Drop Out (LDO) Regulators RoHS", Simulation ModelName=SPX3819, Simulation ModelText=".SUBCKT SPX3819 VIN VOUT GND EN /  / * PARAMETERS / .PARAM VREF=3.3 / .PARAM VDROP=0.34 / .PARAM ILIM=0.9 / .PARAM ROUT=0.05 /  / * Enable logic (EN > 1V) / EEN VEN 0 VALUE = { V(EN) > 1 } /  / * Regulator core (with dropout) / EREG VREG 0 VALUE = { V(VEN)*LIMIT(V(VIN)-VDROP, 0, VREF) } /  / * Output resistance / Rout VREG VOUT {ROUT} /  / * Current sense / Rsense VOUT VSENSE 0.01 /  / * Current limit clamp / GCLAMP VOUT 0 VALUE = {  /     IF(I(Rsense) > ILIM, -(I(Rsense)-ILIM)*5, 0) / } /  / * Ground reference / RGND GND 0 1m /  / .ENDS SPX3819", Simulation PortMap=(1:1),(2:3),(3:4),(4:NC),(5:2)
IC2: library part LM5164DDAR
IC3: library part DRV8300NRGER
IC4: library part GS8592-MR
J1 J2 J3 J4: library part 2way, ComponentLink1Description=Source, ComponentLink1URL=http://www.edatools.cz/addons, FootprintNote="LP=12mil, MP=40mil, HP=120mil"
L1: library part SRN6045TA-470M, "FIXED IND 47uH 1.6A 200mΩ SMD,6x6mmSMD,5x5mm Fixed Inductors RoHS"
L2: library part FNR5040S470MT, "1.15A 47uH ±20% 1.2A 354mΩ Magnetic Shielded Inductor SMD,5x5mm Fixed Inductors RoHS"
L3: library part BLM18PG121SN1D, Simulation ModelName=FB_220_ADV, Simulation ModelText=".SUBCKT FB_220_ADV 1 2 /  / Rdc 1 2 0.045 /  / * low freq inductive / L1 1 3 50n / R1 3 2 1 /  / * high freq loss / R2 1 2 200 / Cpar 1 2 2p /  / .ends FB_220_ADV", Simulation PortMap=(1:1),(2:2)
LED1 LED2: "20mA 2.3V Red 50mW 0603 LED Indication - Discrete ROHS", Simulation ModelName=L_Inductor_Default, Simulation ModelText="L_Inductor_Default 1 0 1u", Simulation PortMap=(1:1),(2:2)
Q1: library part MMBT3904TT1G, "Bipolar (BJT) Transistor NPN 40V 200mA 300MHz 200mW Surface Mount SOT-416", Simulation ModelName=MMBT3904, Simulation ModelText=".subckt MMBT3904 C  B  E  params: Vceo=40 Vcbo=60 Vebo=6 Ic=200m hfe=300 Ices=100n Vbe=700m ft=300Meg Ccbo=4p Cebo=8p Rc=1 Rb=.1 Re=.1 Eg=1.11 Xti=3 /  / * Above values are an example for the ***MMBT3904***. Using the / * above symbol file allows for direct insertion of other values / * according to these data sheet parameters: / * / * Vceo    	Collector Emitter voltage, Base open / * Vcbo		Collector Base voltage, Emitter open / * Vebo    	Emitter Base voltage, Collector open / * Ic		DC Collector current / * hfe		Max DC current gain / * Ices		Collector Emitter cut-off current / * Vbe		Min Base Emitter voltage / * ft		Gain bandwidth product / * Ccbo		Typ. Collector Base capacitance / * Cebo		Typ. Emitter Base capacitance / * Rc/Rb/Re	Fixed values / * / * Activation energy: Eg=1.11 for Si (npn) transistor / * Sat.-current temp. exp: Xti=3 for Si (npn) transistor /  / Q  C B E  Transistor /  / .model Transistor NPN(Is={Ices/2} Bf={hfe} Bvcbo={Vcbo} Bvbe={-Vebo} Vceo={Vceo} Vje={Vbe} Tf={1/(2*pi*ft)} Eg={Eg} Xti={Xti} Icrating={Ic} Cjc={Ccbo*2} Cje={Cebo*2} Rc={Rc} Rb={Rb} Re={Re} mfg=Diotec) /  / .ends", Simulation PortMap=(1:2),(2:3),(3:1)
Q2 Q3 Q4 Q5 Q6 Q7: library part AGM028N08A
R1: library part FRC0603F4533TS, "RES 453kΩ ±1% 100mW 0603", Simulation ModelName=R_Resistor_Default, Simulation ModelText="R_Resistor_Default 1 0 1K", Simulation PortMap=(1:1),(2:2)
R2 R3: library part RC0603FR-0710KL, "100mW 10kΩ 75V ±100ppm/℃ Thick Film Resistor ±1% 0603 Chip Resistor - Surface Mount ROHS"
R4: library part FRC0603F6042TS, "RES 60.4kΩ ±1% 100mW 0603", Simulation ModelName=R_Resistor_Default, Simulation ModelText="R_Resistor_Default 1 0 1K", Simulation PortMap=(1:1),(2:2)
R5: library part RC0603FR-0749K9L, "100mW 49.9kΩ 75V Thick Film Resistor ±100ppm/℃ ±1% 0603 Chip Resistor - Surface Mount RoHS", Simulation ModelName=R_Resistor_Default, Simulation ModelText="R_Resistor_Default 1 0 1K", Simulation PortMap=(1:1),(2:2)
R6 R8 R9 R14 R15 R19 R44 R45: library part RT0402BRD0710KL, "RES 10kΩ ±0.1% 62.5mW 0402"
R7 R10 R11 R13 R16 R17 R42 R43: library part RT0402BRD071KL, "RES 1kΩ ±0.1% 62.5mW 0402", Simulation ModelName=R_Resistor_Default, Simulation ModelText="R_Resistor_Default 1 0 1K", Simulation PortMap=(1:1),(2:2)
R12: library part "FRC0402J105 TS", "RES 1MΩ ±5% 62.5mW 0402"
R18 R20: library part RT0402BRD075K1L, "RES 5.1kΩ ±0.1% 62.5mW 0402", Simulation ModelName=R_Resistor_Default, Simulation ModelText="R_Resistor_Default 1 0 1K", Simulation PortMap=(1:1),(2:2)
R21: library part FRC0402F3302TS, "RES 33kΩ ±1% 62.5mW 0402"
R22 R23: library part RT0402BRD07100RL, "RES 100Ω ±0.1% 62.5mW 0402"
R24 R25 R26 R30 R31 R32: library part WR121WF100JT5E, "RES 10Ω ±1% 1W 0612"
R27 R28 R29 R33 R34 R35: library part ERJPA2J160X, "RES 16Ω ±5% 200mW 0402", Simulation ModelName=R_Resistor_Default, Simulation ModelText="R_Resistor_Default 1 0 1K", Simulation PortMap=(1:1),(2:2)
R38 R39: library part RLP25FEGMR005, "RES 5mΩ ±1% 3W 2512"
RA: library part AR03BTCX2703, "RES 270kΩ ±0.1% 100mW 0603", Simulation ModelName=R_Resistor_Default, Simulation ModelText="R_Resistor_Default 1 0 1K", Simulation PortMap=(1:1),(2:2)
SW1: "12V 2.5mm Round Button 3mm SPST 50mA SMD,3x2.5mm Tactile Switches ROHS"
U1: library part STM32G431CBT6
USB1: library part U263-241N-4BQC14
X1: library part ABM3B-8.000MHZ-10-1-U-T, "Crystal 8MHz ±10ppm 10pF 200Ω SMD5032-4P"

## Free pads (board coordinates)
  round 2.2 hole 1.8: 11(1.905,1.905) 11(1.905,28.194) 11(26.673,1.924) 11(26.673,28.114)

## Via types
v1: diameter 0.6, hole 0.4, L1-SIGNAL/PWR to L4-SIGNAL/PWR, 160 vias
v2: diameter 0.45, hole 0.3, L1-SIGNAL/PWR to L4-SIGNAL/PWR, tented both sides, 105 vias
v3: diameter 0.6, hole 0.4, L1-SIGNAL/PWR to L4-SIGNAL/PWR, tented both sides, 35 vias
v4: diameter 0.7, hole 0.4, L1-SIGNAL/PWR to L4-SIGNAL/PWR, tented both sides, 24 vias
v5: diameter 0.7, hole 0.4, L1-SIGNAL/PWR to L4-SIGNAL/PWR, 6 vias
v6: diameter 0.45, hole 0.3, L1-SIGNAL/PWR to L4-SIGNAL/PWR, 5 vias
v7: diameter 1.1, hole 0.6, L1-SIGNAL/PWR to L4-SIGNAL/PWR, tented both sides, 2 vias
v8: diameter 1.1, hole 0.6, L1-SIGNAL/PWR to L4-SIGNAL/PWR, 1 vias

## Nets (pads, with @x,y where several pads share a name; then routed paths per layer and width w, separated by ;. In a path a pad name is that pad's centre, name@x,y a point inside that pad or via, vN(x,y) a via of type N, cw(c..) or ccw(c..) an arc to the next point about the centre after c; other vN are vias at no path point)
3V3: C17.2 C18.2 C19.2 C28.2 C29.2 C30.2 C31.2 C32.2 C33.2 H1.1 L3.2 R6.2 R42.1 R44.2 U1.1 U1.24 U1.36 U1.48 | length 59.4
  L1-SIGNAL/PWR w0.2: 4.432,11.189 4.432,8.54 5.071,7.902 5.468,7.902 5.644,7.726 6.198,7.172 R42.1@6.198,7.099
  L1-SIGNAL/PWR w0.4: R6.2@2.803,10.886 4.13,10.886 4.432,11.189 5.216,11.972 C18.2@5.844,11.972 ; C17.2@7.656,11.929 7.613,11.972 C18.2@5.844,11.972 ; L3.2@7.732,10.061 5.957,10.061 C19.2@5.898,10.12 5.898,11.918 C18.2@5.844,11.972 ; v2(13.445,7.157) 13.445,4.407 13.949,3.903 v2(15.844,3.903) ; v2(14.714,10.055) 14.723,10.064 15.289,10.064 16.765,11.541 16.765,14.07 v2(17.338,14.643)
  L1-SIGNAL/PWR w0.5: C17.2@7.656,11.929 7.667,11.918 8.166,11.918 8.834,11.25 8.834,9.348 ; 8.834,9.348 8.834,8.004 v2(8.862,8.004)
  L4-SIGNAL/PWR w0.2: 7.688,7.288 U1.1@7.688,7.537 ; 8.862,6.037 U1.48@9.188,6.037 ; 16.188,7.383 U1.36@16.188,7.537
  L4-SIGNAL/PWR w0.3: 7.688,7.172 7.688,7.288 ; 8.708,6.037 8.862,6.037 ; 16.188,7.121 16.188,7.383
  L4-SIGNAL/PWR w0.4: 7.703,7.157 7.703,6.778 C29.2@7.869,6.612 ; 8.708,6.037 8.135,5.464 C33.2@7.869,5.464 C29.2@7.869,6.612 ; v2(13.445,7.157) 13.689,7.4 13.689,9.467 ; v2(14.714,10.055) 14.681,10.088 14.654,10.088 14.033,9.467 13.689,9.467 ; U1.24@14.73,14.621 15.004,14.621 C31.2@15.687,15.305 15.687,14.079 C28.2@15.817,13.95 15.817,14.122 16.329,14.635 17.151,14.635 17.154,14.631 17.157,14.635 17.338,14.635 17.342,14.639 v2(17.338,14.643) ; v2(15.844,3.903) 17.001,3.903 ; 16.188,7.121 15.594,6.527 C32.2@15.594,6.32 15.603,6.311 C30.2@16.68,6.311 17.046,6.311 17.288,6.069 17.288,5.844 17.35,5.782 17.35,4.661 17.288,4.599 17.288,4.19 17.001,3.903 ; H1.1@17.416,1.301 17.416,1.581 16.689,2.309 R44.2@16.689,3.111 16.689,3.591 17.001,3.903 ; C29.2@7.869,6.612 8.291,6.612 8.862,7.182 v2(8.862,8.004) 10.325,9.467 10.425,9.467 13.689,9.467
3V3A: C24.2 C25.2 C27.2 C36.2 C37.2 IC1.5 IC4.8 L3.1 R7.2 R21.2 U1.20 U1.21 | length 36.2
  L1-SIGNAL/PWR w0.4: 12.745,7.574 12.908,7.574 ; v2(12.952,15.875) 13.413,15.875 13.983,15.305 C37.2@13.983,15.08 ; 13.146,7.812 17.492,7.812 18.093,7.211 v2(18.093,7.008) 18.476,7.008 18.764,6.72 ; IC4.8@18.965,5.414 18.965,6.519 18.764,6.72 ; 19.651,4.922 19.482,5.091 19.482,6.435 19.197,6.72 18.764,6.72 ; 19.661,4.912 23.31,4.912 R21.2@23.365,4.857
  L1-SIGNAL/PWR w0.5: L3.1@7.732,8.662 7.732,7.659 8.363,7.028 C25.2@9.437,7.028 9.454,7.011 C24.2@11.151,7.011 ; IC1.5@11.484,8.661 11.484,8.136 11.151,7.803 C24.2@11.151,7.011 ; 12.745,7.574 12.379,7.94 12.379,11.977 13.996,13.594 C36.2@13.996,13.893 ; R7.2@13.146,8.556 13.146,7.812 12.908,7.574 12.345,7.011 C24.2@11.151,7.011 ; C36.2@13.983,14.098 C37.2@13.983,15.08
  L4-SIGNAL/PWR w0.2: U1.20@12.688,14.537 12.688,15.414 12.822,15.548 12.952,15.548 13.081,15.548 13.188,15.441 U1.21@13.188,14.537
  L4-SIGNAL/PWR w0.3: 12.952,15.548 v2(12.952,15.875)
  L4-SIGNAL/PWR w0.4: C27.2@18.093,6.605 v2(18.093,7.008)
12V: C1.2 C23.2 C34.2 CA.2 D3.2 D5.2 D6.2 IC1.1 IC3.4 L1.2 R1.2 R2.1 | length 56
  L1-SIGNAL/PWR w0.25: 24.095,9.788 IC3.4@24.095,10.333
  L1-SIGNAL/PWR w0.3: v2(19.98,17.005) 20.286,17.312 R1.2@20.286,17.675
  L1-SIGNAL/PWR w0.4: D3.2@15.687,14.476 15.687,15.151 15.889,15.353 v2(17.917,15.353) ; v2(21.197,8.689) 21.197,8.624 21.201,8.62 23.477,8.62 C34.2@23.715,8.858 ; C34.2@23.749,9.033 24.095,9.379 24.095,9.727
  L1-SIGNAL/PWR w0.5: R2.1@9.284,13.84 10.36,13.84 10.438,13.918 ; v3(10.939,16.019) 10.912,16.019 10.442,15.548 10.442,14.432 10.438,14.429 10.438,13.918 ; IC1.1@11.484,10.862 11.484,12.297 C23.2@11.338,12.442 10.833,12.442 10.438,12.837 10.438,13.918 ; v2(19.43,20.622) 19.432,20.619 CA.2@19.98,20.619 20.402,21.042 D5.2@22.848,21.042 22.856,21.05 D6.2@24.836,21.05 ; L1.2@19.98,24.223 L1.2@20.349,24.592
  L4-SIGNAL/PWR w0.4: 17.882,17.182 17.882,15.388 v2(17.917,15.353) ; 19.145,13.65 19.145,17.187 19.145,17.374 ; 19.173,13.622 19.832,12.963 19.832,12.11 21.197,10.746 v2(21.197,8.689)
  L4-SIGNAL/PWR w0.5: v3(10.939,16.019) 12.107,17.187 19.145,17.187 19.22,17.187 ; 19.145,17.374 18.538,17.98 18.538,20.596 ; 19.276,17.243 19.508,17.011 ; v2(19.43,20.622) 18.564,20.622 18.538,20.596 ; 19.513,17.005 v2(19.98,17.005) ; v3(20.599,28.411) 19.267,28.411 18.538,27.682 18.538,20.596
BSTA: C44.2 D3.1 IC3.20 | length 3.5
  L1-SIGNAL/PWR w0.2: D3.1@18.957,14.476 19.592,14.476 20.312,13.756 20.674,13.756 21.307,13.123 IC3.20@21.929,13.123
BSTB: C45.2 D5.1 IC3.17 | length 4.1
  L1-SIGNAL/PWR w0.2: D5.1@22.848,17.772 22.848,17.087 C45.2@22.164,16.403 22.164,15.936 23.095,15.005 IC3.17@23.095,14.333
BSTC: C46.2 D6.1 IC3.14 | length 3.5
  L1-SIGNAL/PWR w0.2: C46.2@24.55,16.4 24.55,17.493 D6.1@24.836,17.78 ; IC3.14@24.595,14.333 C46.2@24.595,16.37
CSA: C42.2 IC4.1 R8.2 R22.1 | length 19.7
  L1-SIGNAL/PWR w0.17: IC4.1@19.021,9.762 19.05,9.79 v2(19.539,9.79)
  L1-SIGNAL/PWR w0.2: IC4.1@18.965,9.706 IC4.1@19.021,9.762
  L3-PWR w0.17: v2(14.31,11.025) 14.882,11.597 15.113,11.597 15.984,11.597 17.773,9.808 19.522,9.808 v2(19.539,9.79)
  L4-SIGNAL/PWR w0.17: C42.2@5.077,13.198 5.077,13.471 5.387,13.471 5.619,13.703 6.676,13.703 6.908,13.471 8.486,13.471 9.788,12.168 13.166,12.168 13.568,11.766 v2(14.31,11.025) ; C42.2@5.132,13.166 5.57,12.728 6.028,12.269 R22.1@6.14,12.269
  L4-SIGNAL/PWR w0.2: v2(19.539,9.79) 19.562,9.814 20.252,9.814 R8.2@20.276,9.838